# Altium PCB PCB1.PcbDoc
Units mm, origin at the board's own origin, x right, y up, seen from the top; angles counter-clockwise.
Board outline 65.1 x 66.4 mm, 2 copper layers (Top Layer, Bottom Layer); 68 components, 42 nets, 260 pads, 22 vias.
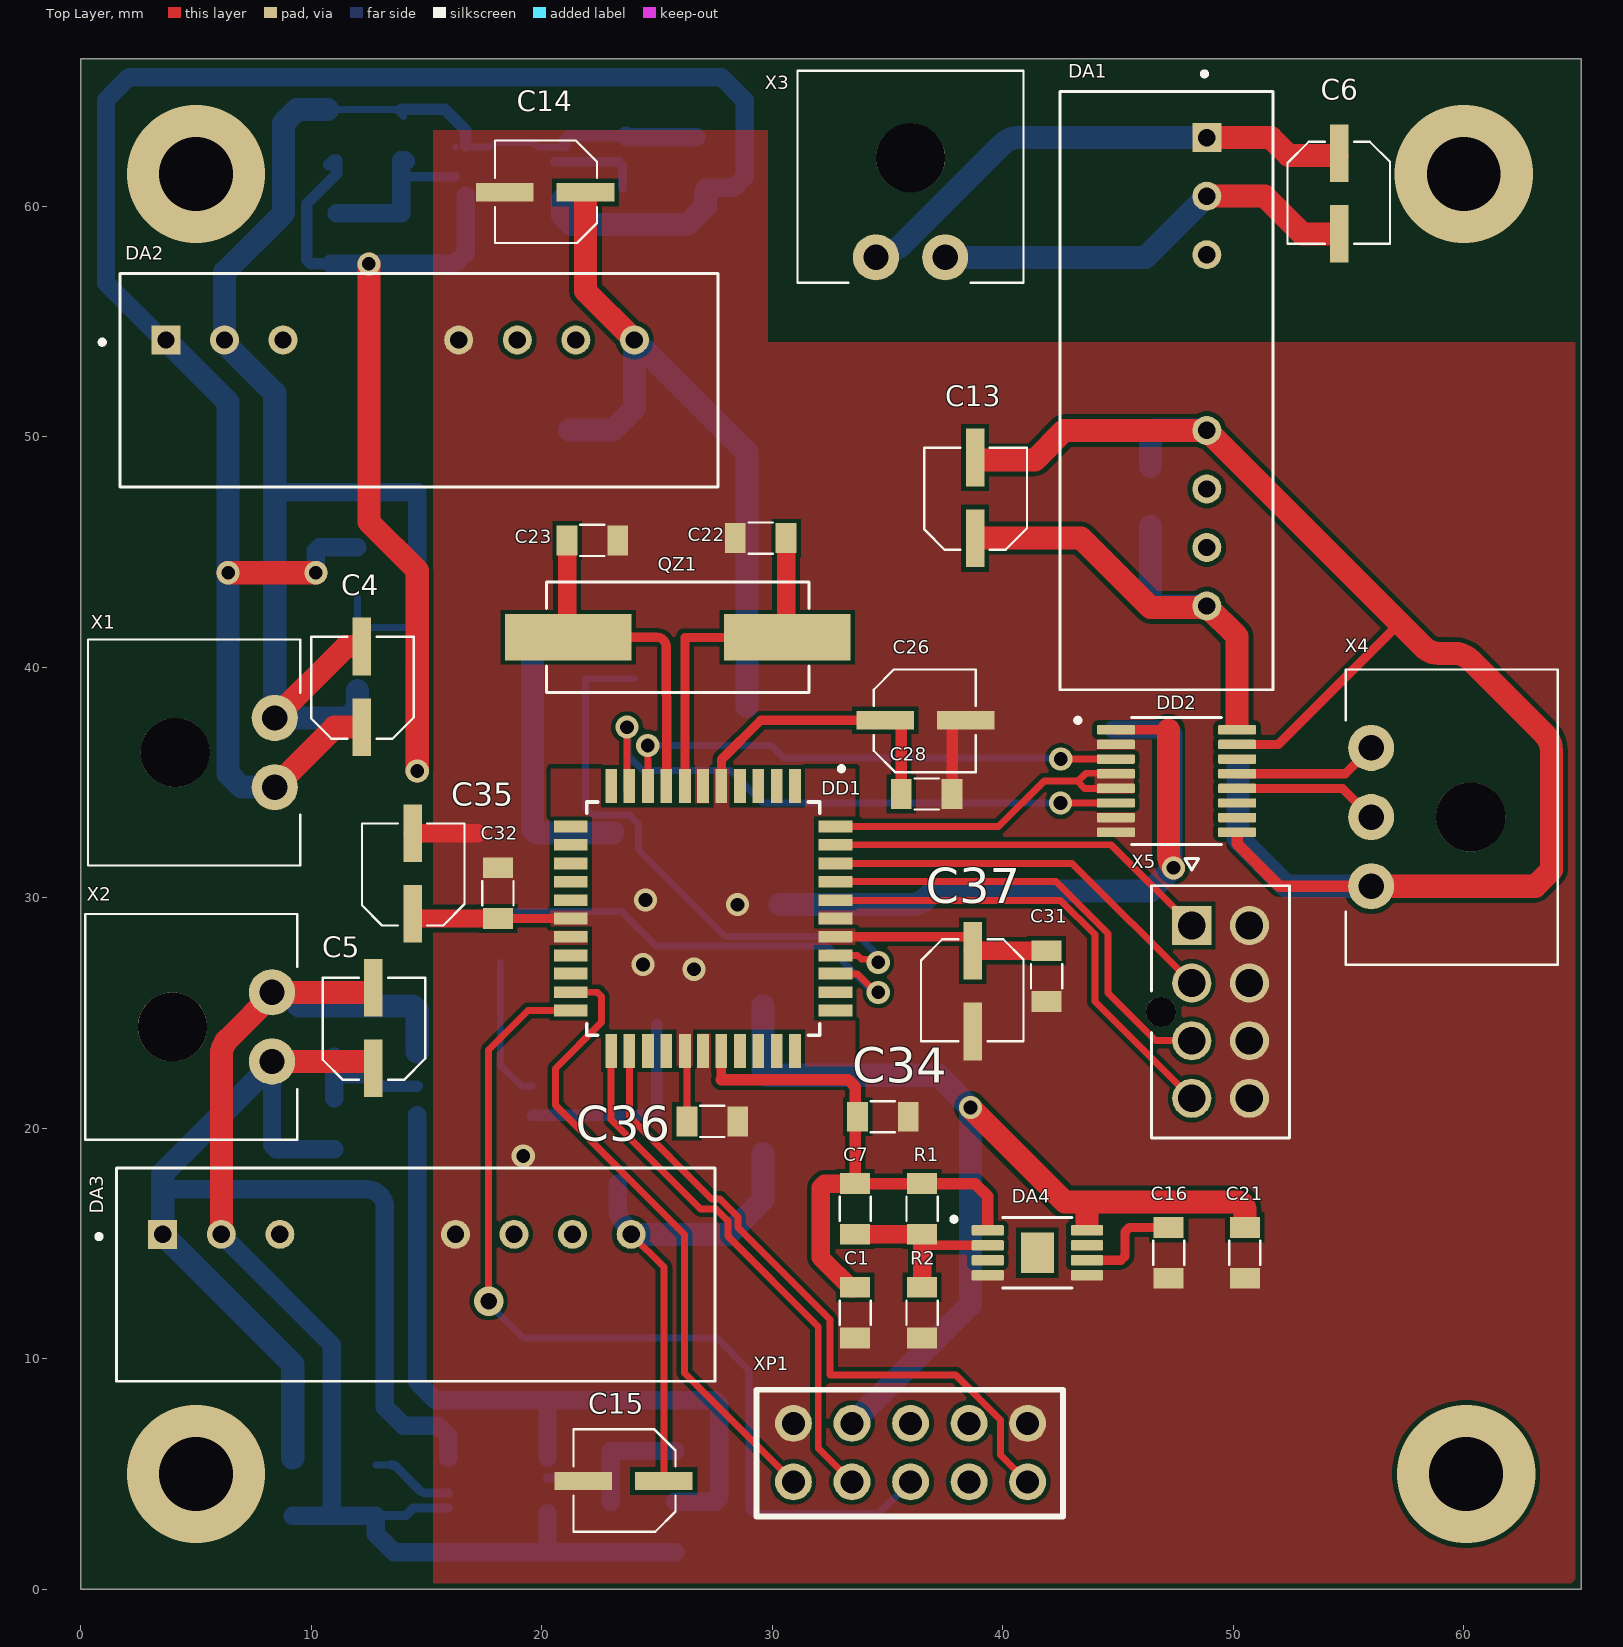
[diagram p0: Top Layer view]
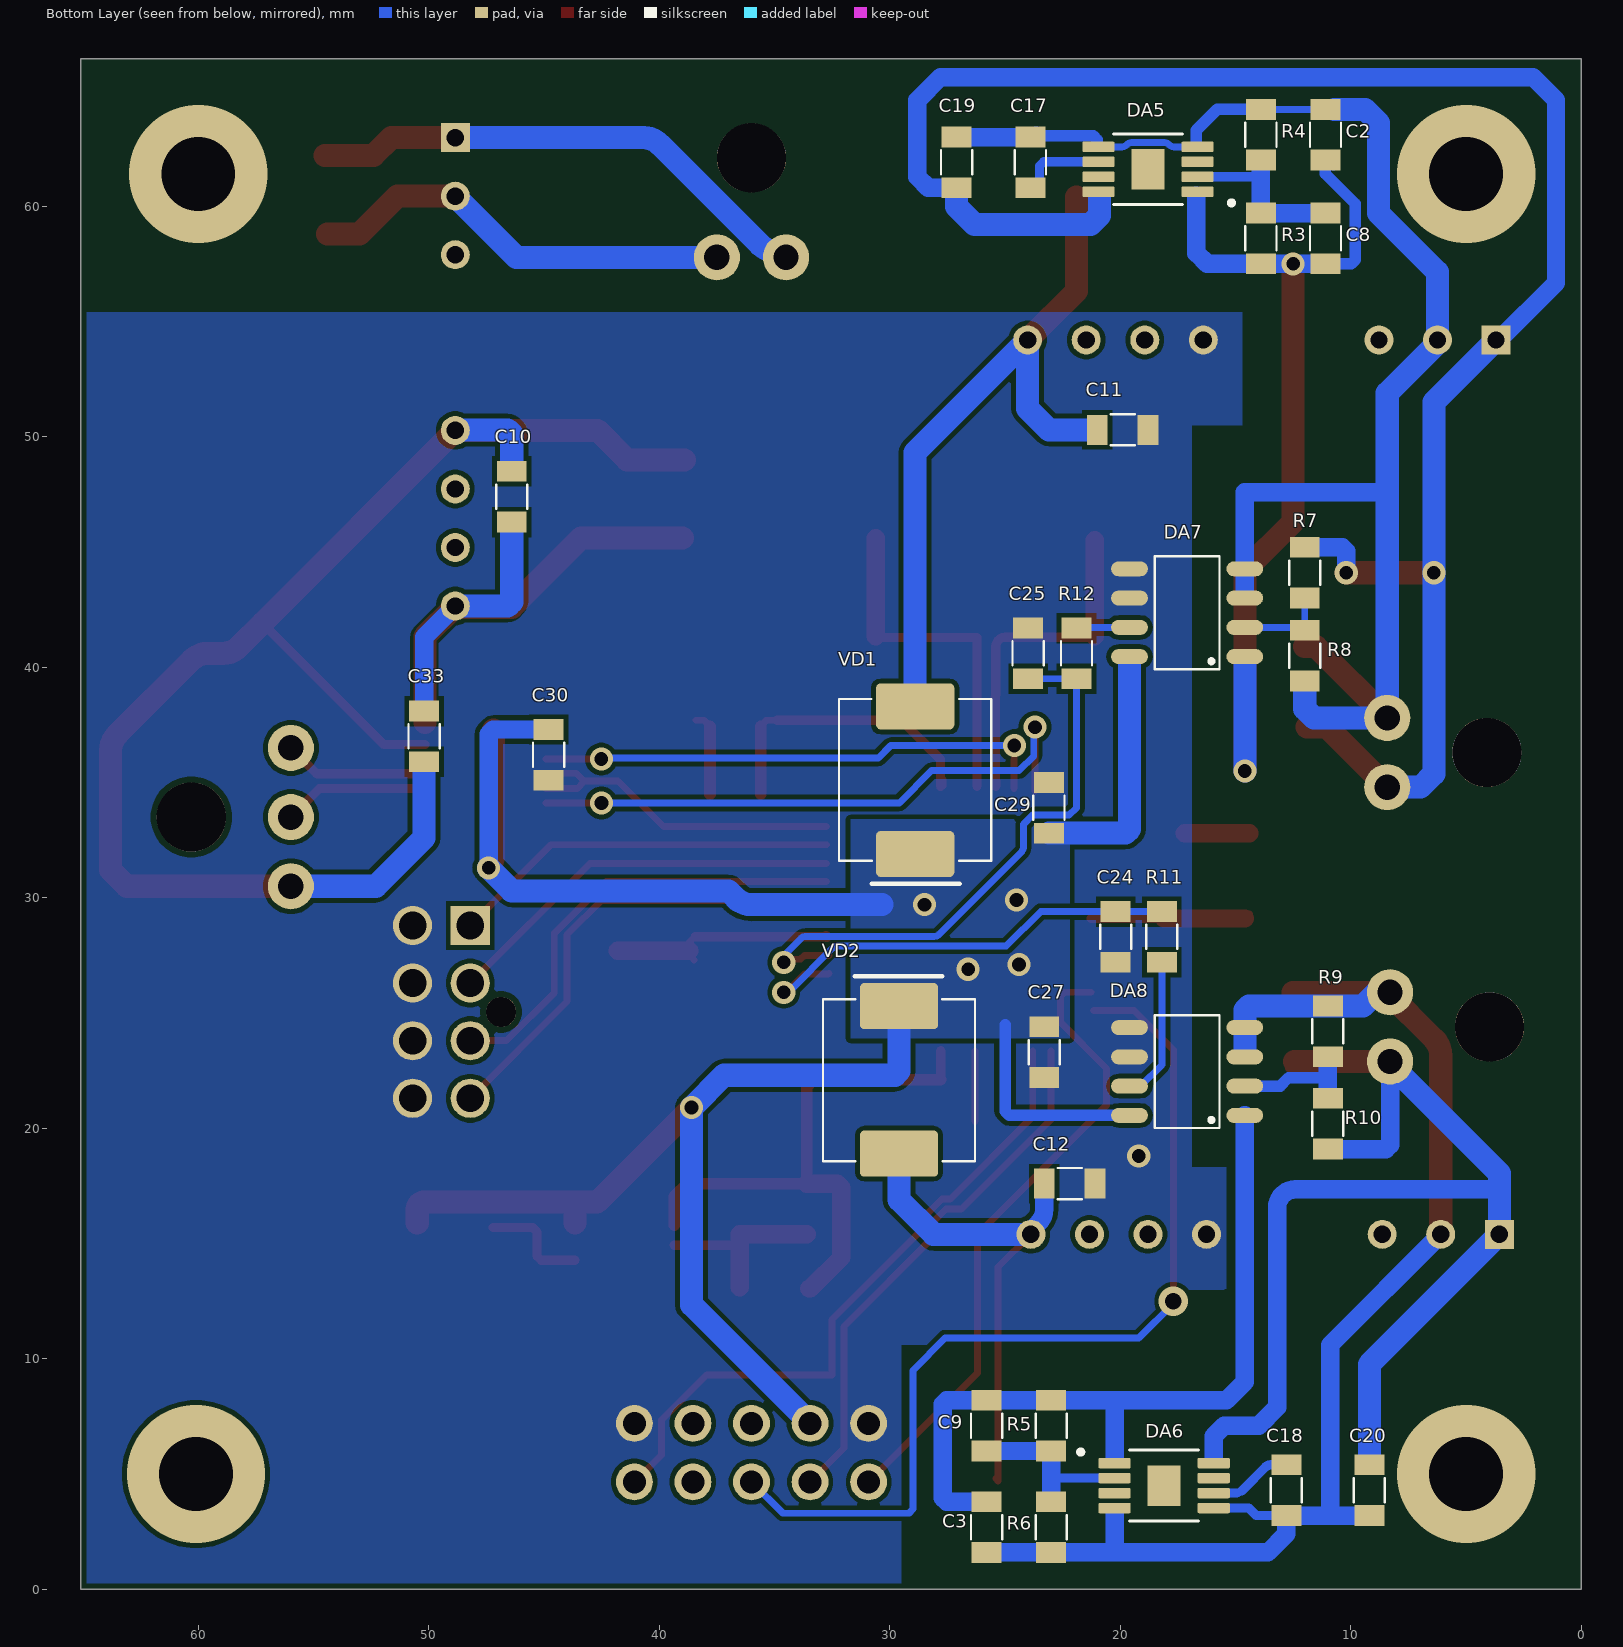
[diagram p1: Bottom Layer view, seen from below]
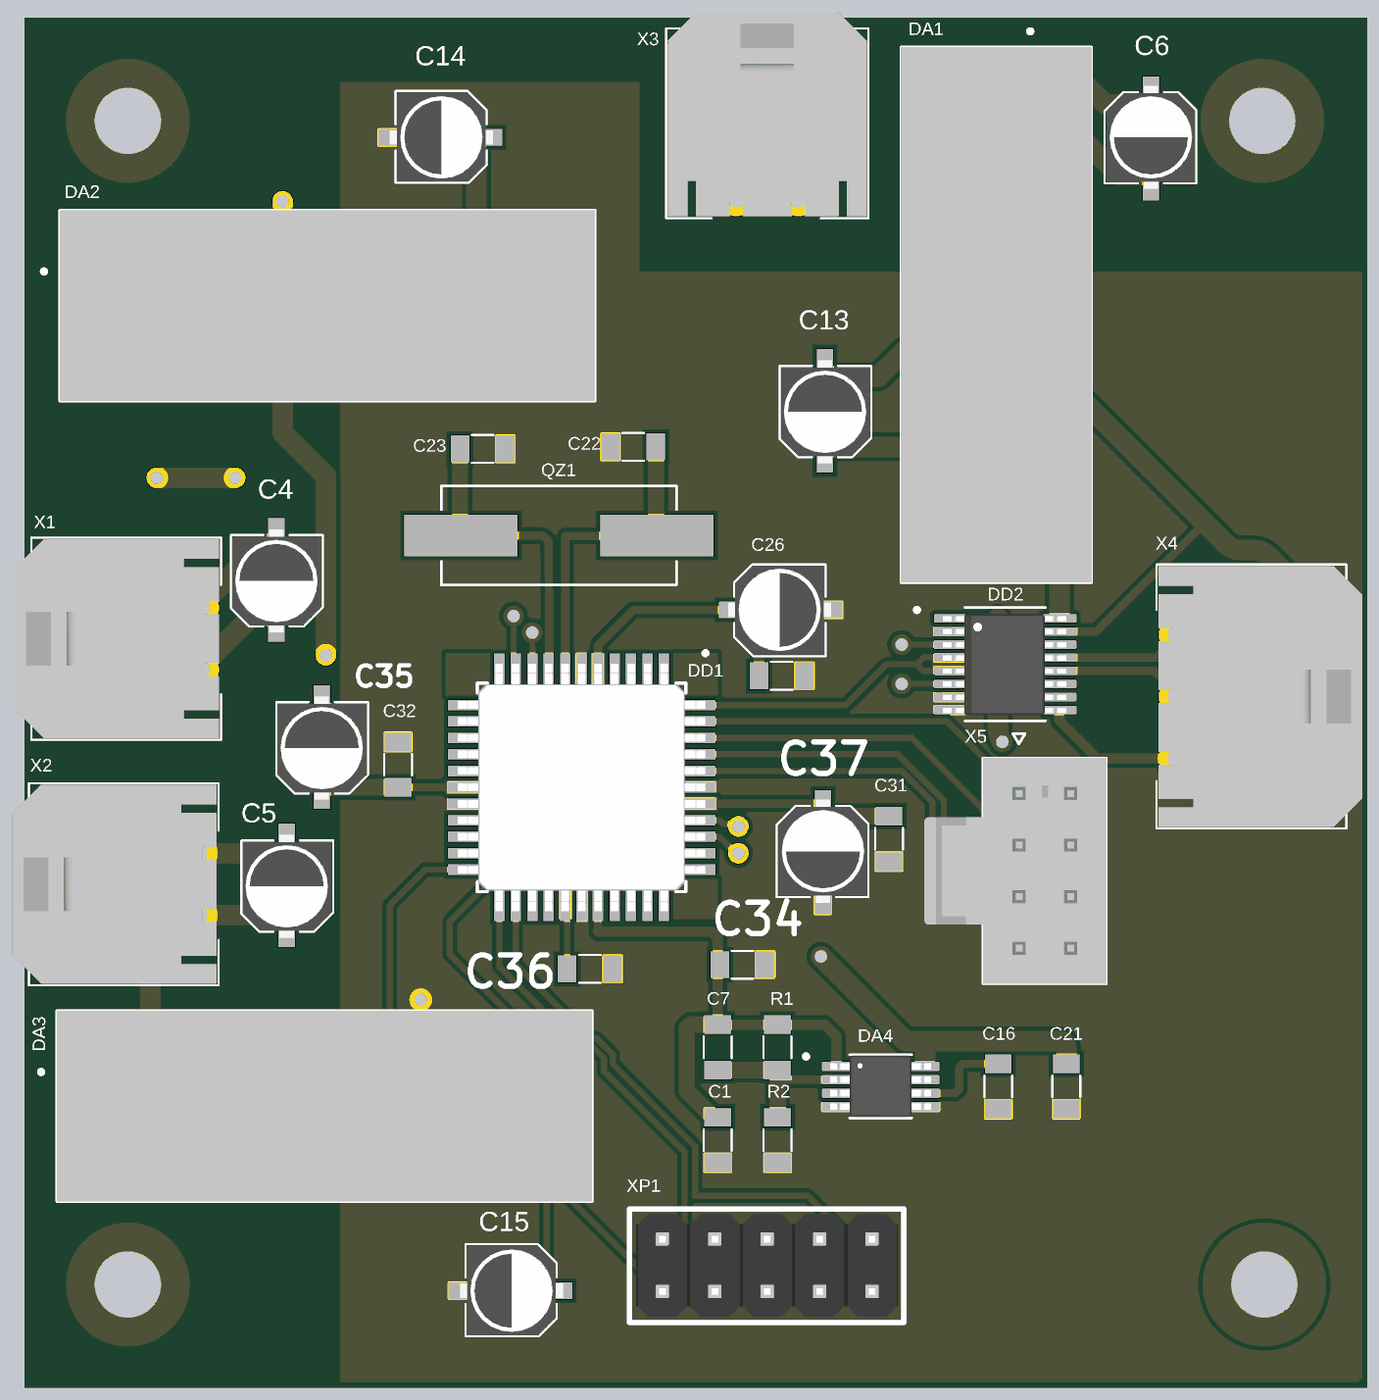
[diagram p2: 3D render of the assembled board from above, using the file's embedded part models]

## Layer stack, top to bottom
Top Solder: solder mask 0.0102, Solder Resist, Dk 3.5
Top Layer: signal copper 0.0356
Dielectric 1: dielectric 0.32, FR-4, Dk 4.8
Bottom Layer: signal copper 0.0356
Bottom Solder: solder mask 0.0102, Solder Resist, Dk 3.5

## Board outline
0,0 0,66.4 65.1,66.4 65.1,0

## Design rules (kind name [scope] priority, off if disabled: settings)
AcuteAngle [All] p1: minimum=3.50000000000000E+0001 checktracksonly=FALSE
BoardOutlineClearance "BoardOutlineClearance 1" [All] p1: gap=0.25 ignorepadtopadclearanceinfootprint=FALSE except(0: Arc-SplitContinuation Track-SplitContinuation SMDPad-SplitContinuation THPad-SplitContinuation Via-SplitContinuation Fill-SplitContinuation Poly-SplitContinuation Region-SplitContinuation Text-SplitContinuation) // Milling
Clearance "Clearance-1 1/2 Oz" [All] p1: gap=0.125 ignorepadtopadclearanceinfootprint=FALSE except(0.2: Arc-Fill Arc-Poly Track-Fill Track-Poly SMDPad-SMDPad SMDPad-Fill SMDPad-Poly THPad-Fill THPad-Poly Via-Fill Via-Poly Fill-Fill Fill-Poly Poly-Poly Poly-Region Poly-Text; 0.25: Arc-Hole Track-Hole SMDPad-Hole THPad-Hole Via-Hole Fill-Hole Poly-Hole Region-Hole Text-Hole) // Standart
ComponentClearance [All] p1: gap=0.1 collisioncheckmode=3 verticalgap=0.1 showdistances=FALSE
DiffPairsRouting DiffPair_DiffPairsRouting [InDifferentialPair ('XTAL')] p1: maxlimit=0.4 minlimit=0.2 mostfreqgap=0.3 toplayer_minwidth=0.3 toplayer_maxwidth=0.5 toplayer_prefwidth=0.4 bottomlayer_minwidth=0.3 bottomlayer_maxwidth=0.5 bottomlayer_prefwidth=0.4 maxuncoupledlength=12.7
DiffPairsRouting "Schematic Differential Pairs Routing_1" [InNet('RS_485_N')] p2: maxlimit=0.254 minlimit=0.254 mostfreqgap=0.254 toplayer_minwidth=0.381 toplayer_maxwidth=0.381 toplayer_prefwidth=0.381 bottomlayer_minwidth=0.381 bottomlayer_maxwidth=0.381 bottomlayer_prefwidth=0.381 maxuncoupledlength=12.7
DiffPairsRouting "Schematic Differential Pairs Routing" [InNet('RS_485_P')] p3: maxlimit=0.254 minlimit=0.254 mostfreqgap=0.254 toplayer_minwidth=0.381 toplayer_maxwidth=0.381 toplayer_prefwidth=0.381 bottomlayer_minwidth=0.381 bottomlayer_maxwidth=0.381 bottomlayer_prefwidth=0.381 maxuncoupledlength=12.7
DiffPairsRouting "DiffPairsRouting 1/2 Oz" [All] p4: maxlimit=0.254 minlimit=0.125 mostfreqgap=0.254 toplayer_minwidth=0.125 toplayer_maxwidth=0.5 toplayer_prefwidth=0.381 bottomlayer_minwidth=0.125 bottomlayer_maxwidth=0.5 bottomlayer_prefwidth=0.381 maxuncoupledlength=12.7
HoleSize "Minimum HoleSize" [IsPad] p1: absolutevalues=TRUE maxlimit=5.9 minlimit=0.6 maxpercent=80.000 minpercent=20.000
HoleSize "Minimum HoleSize VIA 1" [IsVia] p2: absolutevalues=TRUE maxlimit=5.9 minlimit=0.3 maxpercent=80.000 minpercent=20.000 // Standart
HoleToHoleClearance Hole2HoleClearance [All] p1: gap=0.25 allowstackedmicrovias=FALSE
MatchedLengths DiffPair_MatchedLengths [InDifferentialPair ('XTAL')] p1: tolerance=25.4 checknetsindiffpair=FALSE checkdiffpairvsdiffpair=TRUE checkxsignals=TRUE checkothers=TRUE
MatchedLengths [InDifferentialPair('RS_485')] p2: tolerance=1 checknetsindiffpair=TRUE checkdiffpairvsdiffpair=FALSE checkxsignals=FALSE checkothers=FALSE
MinimumAnnularRing "Minimum AR VIA Standart" [All] p1: minimumring=0.15
MinimumAnnularRing "Minimum AR PAD Standart" [All] p2: minimumring=0.2
MinimumSolderMaskSliver "SolderMask Bridge Standart" [All] p1: minsoldermaskwidth=0.1 // All Masks
PlaneClearance "PlaneClearance-1 1/2 Oz" [All] p1: clearance=0.2 // Standart
PlaneConnect "TermalConnect-1 1/2 Oz" [All] p1: planeconnectstyle=Relief reliefexpansion=0.2 reliefentries=4 reliefconductorwidth=0.2 reliefairgap=0.2 // Standart
PolygonConnect "PolygonConnect-1 1/2 Oz" [All] p1: connectstyle=Direct reliefconductorwidth=0.254 reliefentries=4 polygonreliefangle="90 Angle" airgapwidth=0.2 // Standart
RoutingCorners [All] p1 off: cornerstyle=45-Degree minsetback=2.54 maxsetback=2.54
RoutingVias [All] p1: holewidth=0.4 width=0.8 viastyle="Through Hole" minholewidth=0.3 minwidth=0.6 maxholewidth=5.9 maxwidth=8.9
SilkToSilkClearance Silk2SilkClearance [All] p1 off: silktosilkclearance=0.15
SilkToSolderMaskClearance Silk2SolderMaskClearance [IsPad] p1 off: minsilkscreentomaskgap=0.15 clearancetoexposedcopper=TRUE
SolderMaskExpansion SolderMaskExpansion-1 [All] p1: expansion=0.05 istentingtop=FALSE // Standart
UnRoutedNet [All] p1: checkbadconnections=TRUE
Width "Width 1/2 Oz" [All] p1: maxlimit=1 minlimit=0.2 preferedwidth=0.3 checkconnectedcopper=TRUE
19 further rules are at their usual default settings.

## Classes and differential pairs
differential pair RS_485: +RS_485_P -RS_485_N

## Components (designator, comment, footprint, x,y, rotation, side; value= is the part's Value field where it differs from the comment)
C1 "CAP" 0805 33.6,12 r270 top
C2 "CAP" 0805 11.1,63.1 r90 bottom
C3 "CAP" 0805 25.8,2.7 r270 bottom
C4 "CAP" "Cap pol 4x5.4" 12.2,40.9 r0 top
C5 "CAP" "Cap pol 4x5.4" 12.7,26.1 r0 top
C6 "CAP" "Cap pol 4x5.4" 54.6,58.8 r180 top
C7 "CAP" 0805 33.6,16.5 r270 top
C8 "CAP" 0805 11.1,58.6 r90 bottom
C9 "CAP" 0805 25.8,7.1 r270 bottom
C10 "CAP" 0805 46.4,47.4 r90 bottom
C11 "CAP" 0805 19.9,50.3 r180 bottom
C12 "CAP" 0805 22.2,17.6 r180 bottom
C13 "CAP" "Cap pol 4x5.4" 38.8,49.1 r0 top
C14 "CAP" "Cap pol 4x5.4" 18.4,60.6 r90 top
C15 "CAP" "Cap pol 4x5.4" 21.8,4.7 r90 top
C16 "CAP" 0805 47.2,14.6 r270 top
C17 "CAP" 0805 23.9,61.9 r90 bottom
C18 "CAP" 0805 12.8,4.3 r270 bottom
C19 "CAP" 0805 27.1,61.9 r90 bottom
C20 "CAP" 0805 9.2,4.3 r270 bottom
C21 "CAP" 0805 50.5,14.6 r270 top
C22 "CAP" 0805 29.5,45.6 r0 top
C23 "CAP" 0805 22.2,45.5 r180 top
C24 "CAP" 0805 20.2,28.3 r270 bottom
C25 "CAP" 0805 24,40.6 r90 bottom
C26 "CAP" "Cap pol 4x5.4" 38.4,37.7 r270 top
C27 "CAP" 0805 23.3,23.3 r270 bottom
C28 "CAP" 0805 36.7,34.5 r0 top
C29 "CAP" 0805 23.1,33.9 r90 bottom
C30 "CAP" 0805 44.8,36.2 r270 bottom
C31 "CAP" 0805 41.9,26.6 r270 top
C32 "CAP" 0805 18.1,30.2 r90 top
C33 "CAP" 0805 50.2,37 r270 bottom
C34 "CAP" 0805 34.8,20.5 r180 top
C35 "CAP" "Cap pol 4x5.4" 14.4,32.8 r0 top
C36 "CAP" 0805 27.4,20.3 r0 top
C37 "CAP" "Cap pol 4x5.4" 38.7,24.2 r180 top
DA1 "Isolated DC/DC (TMR 2-2411WI)" SIP-9 47.1,52 r270 top
DA2 "Isolated DC/DC (TMR 2-2411WI)" SIP-9 14.675,52.45 r0 top
DA3 "Isolated DC/DC (TMR 2-2411WI)" SIP-9 14.535,13.65 r0 top
DA4 "TPS7A4901" HVSSOP-8 41.5,14.6 r0 top
DA5 "TPS7A4901" HVSSOP-8 18.8,61.6 r0 bottom
DA6 "TPS7A4901" HVSSOP-8 18.1,4.5 r180 bottom
DA7 "Isolated Op_Amp(AMC1350)" SOIC-8 14.6,40.46 r0 bottom
DA8 "Isolated Op_Amp(AMC1350)" SOIC-8 14.6,20.56 r0 bottom
DD1 "Atmega164PA" TQFP-44 27,29.1 r270 top
DD2 "Isolated RS485 Tranciever(ADM2461E)" SSOP-16 47.5,35 r0 top
QZ1 "Quartz rez" XTAL 25.9,41.3 r0 top
R1 "68K" 0805 36.5,16.5 r90 top
R2 "100K" 0805 36.5,12 r90 top
R3 "324K" 0805 13.9,58.6 r270 bottom
R4 "100K" 0805 13.9,63.1 r270 bottom
R5 "324K" 0805 23,7.1 r90 bottom
R6 "100K" 0805 23,2.7 r90 bottom
R7 "56К" 0805 12,44.1 r90 bottom
R8 "10K" 0805 12,40.5 r90 bottom
R9 "10К" 0805 11,24.2 r270 bottom
R10 "56К" 0805 11,20.2 r270 bottom
R11 "10К" 0805 18.2,28.3 r270 bottom
R12 "10К" 0805 21.9,40.6 r90 bottom
VD1 "Shottky Diode" SMC 28.9,35.1 r270 bottom
VD2 "Shottky Diode" SMC 29.6,22.1 r90 bottom
X1 "Molex 2 pin connector" "MolexMicroFit 2x1" 8.42,37.8 r270 top
X2 "Molex 2 pin connector" "MolexMicroFit 2x1" 8.3,25.9 r270 top
X3 "Molex 2 pin connector" "MolexMicroFit 2x1" 37.5,57.78 r180 top
X4 "3 pin RS485 connector (Molex)" "MolexMicroFit 3x1" 55.98,33.5 r90 top
X5 "Molex (Nanofit) 8 pin" "Molex Nanofit 8 pin" 46.86,25.05 r270 top
XP1 "JTAG Connector(10pin)" "PLD 10" 30.92,4.66 r0 top

## Footprints (in the part's own frame and the unit in brackets; to place one, negate y for a bottom-side part, rotate by r counter-clockwise, add the part's x,y. Pads: shape width x height; smd on the part's side, far side on the other; paste and mask are expansions set on the pad)
0805 [mm]
  rect 0.9x1.3 smd: 1(-1.1,0) 2(1.1,0)
  silkscreen extent -0.53,-0.67 0.53,0.67, body extent -1.05,-0.67 1.05,0.68, height 0.6
"Cap pol 4x5.4" [mm]
  rect 0.8x2.5 smd: 1(0,0) 2(0,-3.5)
  silkscreen extent -2.2,-4 2.25,0.43, body extent -2.15,-4.3 2.15,0.7, height 5.4
HVSSOP-8 [mm]
  rrect25% 1.4x0.45 smd: 1(-2.15,0.975) 2(-2.15,0.325) 3(-2.15,-0.325) 4(-2.15,-0.975) 5(2.15,-0.975) 6(2.15,-0.325) 7(2.15,0.325) 8(2.15,0.975)
  rect 1.425x1.76 smd paste-2: 9(0,0)
  silkscreen extent -3.72,-1.54 1.5,1.55, body extent -2.45,-1.5 2.45,1.5, height 1.1
"Molex Nanofit 8 pin" [mm]
  rect 1.7x1.7 hole 1.2 mask+0.076: 1(-3.75,1.34)
  round 1.7 hole 1.2 mask+0.076: 2(-1.25,1.34) 3(1.25,1.34) 4(3.75,1.34) 5(-3.75,3.84) 6(-1.25,3.84) 7(1.25,3.84) 8(3.75,3.84)
  round 1.3 hole 1.3 unplated mask+0.076: ""(0,0)
  silkscreen extent -6.65,-0.4 5.47,5.58, body extent -5.47,-3.25 5.47,5.59, height 10.58
"MolexMicroFit 2x1" [mm]
  round 2 hole 1.1: 1(3,0) 2(0,0)
  round 3 hole 3: A(1.5,-4.32)
  silkscreen extent -3.4,-8.1 6.4,1.1, body extent -3.33,-8.9 6.33,1, height 5.64
"MolexMicroFit 3x1" [mm]
  round 2 hole 1.1: 1(3,0) 2(0,0) 3(-3,0)
  round 3 hole 3: A(0,-4.32)
  silkscreen extent -6.4,-8.1 6.4,1.1, body extent -6.32,-8.87 6.32,1.03, height 5.64
"PLD 10" [mm]
  round 1.6 hole 1: 1(0,0) 2(0,2.54) 3(2.54,0) 4(2.54,2.54) 5(5.08,0) 6(5.08,2.54) 7(7.62,0) 8(7.62,2.54) 9(10.16,0) 10(10.16,2.54)
  silkscreen extent -1.6,-1.5 11.7,4, body extent -1.27,-1.23 11.43,3.77, height 8.6
SIP-9 [mm]
  rect 1.258x1.258 hole 0.75: 1(-10.975,1.75)
  round 1.258 hole 0.75: 2(-8.435,1.75) 3(-5.895,1.75) 6(1.725,1.75) 7(4.265,1.75) 8(6.805,1.75) 9(9.345,1.75)
  silkscreen extent -13.84,-4.62 12.98,4.62, body extent -12.97,-4.62 12.97,4.62, height 12.5
SMC [mm]
  rrect20% 2x3.4 smd: 1(-3.2,0) 2(3.2,0)
  silkscreen extent -3.52,-3.3 4.5,3.3, body extent -4.06,-3.15 4.06,3.15, height 2.77
SOIC-8 [mm]
  oval 1.6x0.65 smd: 1(0,0) 2(0,-1.27) 3(0,-2.54) 4(0,-3.81) 5(5,-3.81) 6(5,-2.54) 7(5,-1.27) 8(5,0)
  silkscreen extent 1.1,-4.35 3.9,0.55, body extent -0.36,-4.35 5.41,0.55, height 1.45
SSOP-16 [mm]
  rrect25% 1.65x0.41 smd: 1(-2.593,2.286) 2(-2.593,1.651) 3(-2.593,1.016) 4(-2.593,0.381) 5(-2.593,-0.254) 6(-2.593,-0.889) 7(-2.593,-1.524) 8(-2.593,-2.159) 9(2.667,-2.159) 10(2.667,-1.524) 11(2.667,-0.889) 12(2.667,-0.254) 13(2.667,0.381) 14(2.667,1.016) 15(2.667,1.651) 16(2.667,2.286)
  silkscreen extent -4.34,-2.68 1.98,2.81, body extent -3,-2.4 3,2.5, height 1.75
TQFP-44 [mil]
  rect 58x20 smd: 1(-226,157) 2(-226,126) 3(-226,94) 4(-226,63) 5(-226,31) 6(-226,0) 7(-226,-31) 8(-226,-63) 9(-226,-94) 10(-226,-126) 11(-226,-157) 23(226,-157) 24(226,-126) 25(226,-94) 26(226,-63) 27(226,-31) 28(226,0) 29(226,31) 30(226,63) 31(226,94) 32(226,126) 33(226,157)
  rect 20x58 smd: 12(-157,-226) 13(-126,-226) 14(-94,-226) 15(-63,-226) 16(-31,-226) 17(0,-226) 18(31,-226) 19(63,-226) 20(94,-226) 21(126,-226) 22(157,-226) 34(157,226) 35(126,226) 36(94,226) 37(63,226) 38(31,226) 39(0,226) 40(-31,226) 41(-63,226) 42(-94,226) 43(-126,226) 44(-157,226)
  silkscreen extent -260,-199 199,240, body extent -236,-236 236,236, height 46
XTAL [mm]
  rect 5.5x2 smd: 1(-4.75,0) 2(4.75,0)
  silkscreen extent -5.7,-2.4 5.7,2.4

## Part data
C4 C5 C6 C13 C14 C15 C26 C35 C37: library part "Cap Pol 10uF 16V", "ECAP SMD,  16VV, 105°C"
DA4 DA5 DA6: library part LDO(TPS7A4901DGNR)
QZ1: library part QZ, ComponentLink1Description=Chip&Dip, ComponentLink1URL=https://www.chipdip.ru/product0/8006373177
R1 R2 R3 R4 R5 R6 R7 R8 R9 R10 R11 R12: library part Res
DD1: ComponentLink1Description=Datasheet, ComponentLink1URL=https://static.chipdip.ru/lib/562/DOC011562915.pdf, ComponentLink2Description=Chip&Dip, ComponentLink2URL=https://www.chipdip.ru/product/atmega164pa-au?from=suggest_product
XP1: ComponentLink1Description=CHIPDIP, ComponentLink1URL=https://www.chipdip.ru/product/pld-10

## Via types
v1: diameter 1, hole 0.6, Top Layer to Bottom Layer, tented both sides, 10 vias
v2: diameter 1, hole 0.6, Top Layer to Bottom Layer, 7 vias
v3: diameter 6, hole 3.2, Top Layer to Bottom Layer, 4 vias
v4: diameter 1.27, hole 0.711, Top Layer to Bottom Layer, 1 vias

## Nets (pads, with @x,y where several pads share a name; then routed paths per layer and width w, separated by ;. In a path a pad name is that pad's centre, name@x,y a point inside that pad or via, vN(x,y) a via of type N, cw(c..) or ccw(c..) an arc to the next point about the centre after c; other vN are vias at no path point)
2B_AREF: C1.1 C7.1 C34.2 DA4.1 DD1.29 R1.2 | length 25.3
  Top Layer w0.3: C1.1@33.5,13 C1.1
  Top Layer w0.4: 27.787,22.113 DD1.29
  Top Layer w0.5: 27.787,22.113 27.8,22.1 33.307,22.1 33.6,21.807 33.6,20.5 C7.1 R1.2 38.8,17.6 39.35,17.05 39.35,15.8
  Top Layer w0.8: C1.1@33.5,13.05 33.45,13.05 32.1,14.4 32.1,17.424 32.276,17.6 C7.1
5В: C21.1 C26.2 C27.1 C28.1 C29.1 C30.1 C31.1 C32.1 C35.2 C36.1 C37.2 DA4.8 DA7.8 DA8.8 DD1.5 DD1.17 DD1.27 DD1.38 DD2.1 VD1.2 VD2.2 XP1.4 | length 131.4
  Top Layer w0.3: C35.2 C35.2@14.6,29.1 ; C36.1 26.3,23.347 DD1.27@26.313,23.36 ; DD1.5@27.687,34.84 DD1.5@27.687,35.123 ; C26.2 35.35,37.7 C26.2@35.6,37.45 ; C37.2@38.45,28.313 38.7,28.063 C37.2 ; C37.2@38.487,27.313 C37.2@38.5,27.3 ; 43.65,16.674 43.524,16.8 43.65,16.8 ; 47.186,37.286 47.4,37.5 ; 47.354,34.746 47.4,34.7
  Top Layer w0.4: C32.1 DD1.17 ; DD1.5@27.8,34.84 27.8,36 29.5,37.7 C26.2 ; DD1.38@32.84,28.313 C37.2@38.45,28.313 ; DD2.1 47.186,37.286 ; 47.186,34.746 47.354,34.746
  Top Layer w0.45: DD1.38 DD1.38@32.769,28.342
  Top Layer w0.5: C28.1 C26.2@35.6,37.45
  Top Layer w0.8: C35.2@14.6,29.1 C32.1 ; C37.2 C31.1@41.8,27.7
  Top Layer w1: v1(38.6,20.9) 42.7,16.8 43.524,16.8 ; 43.65,15.9 43.65,16.674 ; 43.65,16.8 50.2,16.8 cw(c50.2,16.5) 50.5,16.5 C21.1@50.5,15.9 ; 47.186,37.286 47.186,34.746 47.186,31.916 ccw(c48.186,31.918) v1(47.4,31.3)
  Bottom Layer w0.3: XP1.4@33.26,7.2 XP1.4
  Bottom Layer w0.5: DA8.8 24.824,20.56 25,20.736 25,24.5
  Bottom Layer w0.8: C30.1 47.2,37.3 47.4,37.1 v1(47.4,31.3)
  Bottom Layer w1: DA7.8@19.6,40.2 19.6,32.976 19.776,32.8 C29.1 ; VD2.2 29.6,22.476 29.776,22.3 37.2,22.3 v1(38.6,20.9) 38.6,12.34 XP1.4 ; 30.34,29.7 35.986,29.7 ccw(c35.986,30.7) 36.693,29.993 37,30.3 46.4,30.3 v1(47.4,31.3)
  other v1: 26.6,26.9 24.4,27.1 28.5,29.7 24.5,29.9
5В_RS485: C10.1 C13.2 C33.1 DA1.9 DD2.16 | length 27.6
  Top Layer w0.3: DA1.9@48.795,42.6 DA1.9
  Top Layer w1: C13.2@39,45.6 43.4,45.6 46.4,42.6 DA1.9@48.795,42.6 ; DA1.9 50.167,41.338 50.167,37.6
  Bottom Layer w0.8: DA1.9 50.2,41.305 C33.1
  Bottom Layer w1: C10.1@46.4,46.1 46.4,42.831 46.576,42.655 DA1.9
5В_Оп.ус.1: C2.1 C8.1 DA5.1 DA7.1 R3.2 | length 43
  Top Layer w1: v2(12.5,57.5) 12.5,46.3 14.6,44.2 v2(14.6,35.5)
  Bottom Layer w0.3: C8.1@10.7,57.5 C8.1 ; DA7.1@14.6,40.2 DA7.1
  Bottom Layer w0.5: C8.1@10.7,57.5 9.976,57.5 9.8,57.676 9.8,60.1 11.1,61.4 C2.1 10.97,62 C2.1@10.77,61.8
  Bottom Layer w0.8: C8.1@10.85,57.5 12.354,57.5 v2(12.5,57.5) 13.5,57.5 16.231,57.5 16.7,57.969 DA5.1@16.7,60.45
  Bottom Layer w1: v2(14.6,35.5) DA7.1@14.6,40.2
5В_Оп.ус.2: C3.1 C9.1 DA6.1 DA8.1 R5.2 | length 33.6
  Bottom Layer w0.8: DA8.1 14.6,8.998 15.398,8.2 R5.2 C9.1 27.524,8.2 27.7,8.024 27.7,3.976 27.524,3.8 C3.1 ; DA6.1@20.25,5.7 20.25,8.2
ADC_1: C25.1 DD1.37 R12.1 | length 26.1
  Top Layer w0.3: DD1.37@32.641,27.5 33.7,27.5 33.866,27.334 34.466,27.334 v2(34.6,27.2)
  Bottom Layer w0.3: C25.1 R12.1 21.9,33.9 22.218,33.582 23.807,33.582 24.2,33.189 24.2,32.2 ccw(c24.5,32.2) 24.287,31.989 27.864,28.412 ccw(c28.075,28.625) 28.074,28.325 33.64,28.325 cw(c33.64,28.025) 33.852,28.237 34.7,27.389 v2@34.7,27.2
ADC_2: C24.1 DD1.36 R11.1 | length 20.2
  Top Layer w0.3: DD1.36@32.64,26.712 32.653,26.7 33.7,26.7 34.5,25.9 v2(34.6,25.9)
  Bottom Layer w0.3: R11.1 C24.1 23.45,29.4 24.95,27.9 32.276,27.9 cw(c32.276,27.6) 32.487,27.813 34.313,25.987 ccw(c34.524,26.2) 34.523,25.9 v2@34.7,25.9
NetC7_2: C7.2 DA4.2 R1.1 R2.2 | length 8.1
  Top Layer w0.3: 36.5,14.9 36.525,14.925
  Top Layer w0.4: 36.525,14.925 DA4.2
  Top Layer w0.8: C7.2 R1.1 36.5,14.9 R2.2
NetC8_2: C8.2 DA5.2 R3.1 R4.2 | length 7.5
  Bottom Layer w0.4: 14.1,61.275 DA5.2@16.25,61.275
  Bottom Layer w0.8: C8.2 R3.1 R4.2 14.05,62 R4.2@14.1,61.95
NetC9_2: C9.2 DA6.2 R5.1 R6.2 | length 7.8
  Bottom Layer w0.3: 22.925,4.825 23,4.9
  Bottom Layer w0.4: DA6.2 22.925,4.825
  Bottom Layer w0.8: R6.2 23,4.9 R5.1 C9.2
NetC11_1: C11.1 C14.2 DA2.9 VD1.1 | length 31.2
  Top Layer w1: C14.2@21.9,60.4 21.9,56.32 DA2.9
  Bottom Layer w1: C11.1@21.2,50.3 23.1,50.3 24.02,51.22 DA2.9 28.9,49.32 28.9,48.6 VD1.1
NetC12_1: C12.1 C15.2 DA3.9 VD2.1 | length 22.2
  Top Layer w0.3: DA3.9 25.3,13.98 C15.2 C15.2@25.4,4.8
  Bottom Layer w0.3: DA3.9 DA3.9@23.88,15.566
  Bottom Layer w0.8: C12.1 23.3,16.477 ccw(c24.1,16.477) 23.533,15.913 23.534,15.912 DA3.9@23.88,15.566
  Bottom Layer w1: DA3.9 28.1,15.4 29.6,16.9 VD2.1
NetC16_1: C16.1 DA4.6 | length 4.8
  Top Layer w0.4: DA4.6 45.124,14.275 45.3,14.451 45.3,15.5 45.5,15.7 C16.1
NetC17_1: C17.1 DA5.6 | length 4
  Bottom Layer w0.4: DA5.6@20.55,61.925 23.324,61.925 23.5,61.749 C17.1@23.5,60.8
NetC18_1: C18.1 DA6.6 | length 3.6
  Bottom Layer w0.3: C18.1 13.476,5.4 ; 14.738,4.262 ccw(c14.949,4.475) 14.949,4.175
  Bottom Layer w0.4: 13.476,5.4 cw(c13.476,5.1) 13.687,5.313 14.65,4.35 14.738,4.262 ; 14.949,4.175 DA6.6
NetC22_2: C22.2 DD1.7 QZ1.2 | length 15.2
  Top Layer w0.3: QZ1.2@30.6,41.35 QZ1.2 QZ1.2@30.637,41.287
  Top Layer w0.4: DD1.7 26.213,41.287 QZ1.2@30.637,41.287
  Top Layer w0.8: QZ1.2@30.6,41.35 C22.2
NetC23_2: C23.2 DD1.8 QZ1.1 | length 14.8
  Top Layer w0.3: QZ1.1@21.1,41.35 QZ1.1
  Top Layer w0.4: QZ1.1 25,41.3 cw(c25,40.9) 25.4,40.902 25.425,36.606 cw(c24.6,36.6) 25.425,36.6 25.425,35.377 DD1.8
  Top Layer w0.8: QZ1.1@21.1,41.35 C23.2@21.1,45.5
NetDA7_2: DA7.2 R7.1 R8.2 | length 4.1
  Bottom Layer w0.3: R7.1 R8.2 12.13,41.73 DA7.2
NetDA7_7: DA7.7 R12.2 | length 2.3
  Bottom Layer w0.3: DA7.7 21.87,41.73 R12.2
NetDA8_2: DA8.2 R9.2 R10.1 | length 5.6
  Bottom Layer w0.5: 11,22.2 12.7,22.2 13.07,21.83 DA8.2
  Bottom Layer w0.8: R10.1 11,22.2 R9.2
NetDA8_7: DA8.7 R11.2 | length 6.2
  Bottom Layer w0.3: R11.2 18.2,22.755 19.125,21.83 DA8.7
RE/DE: DD1.44 DD2.4 DD2.5 | length 14.9
  Top Layer w0.3: DD1.44 39.824,33.088 41.8,35.063 43.237,35.063 ; DD2.5 43.554,34.746 43.237,35.063 ; DD2.4 44.888,35.4 43.6,35.4 43.263,35.063 43.237,35.063
RS_485_N: DD2.13 X4.1 | length 6.3
  Top Layer w0.4: DD2.13 54.861,35.381 X4.1
RS_485_P: DD2.12 X4.2 | length 6.3
  Top Layer w0.4: DD2.12 54.734,34.746 X4.2
RxD: DD1.9 DD2.3 | length 22.4
  Top Layer w0.3: v1(24.6,36.6) 24.612,35.503 cw(c24.312,35.5) DD1.9@24.612,35.5 ; DD1.9@24.612,34.74 DD1.9@24.612,35.5 ; v1@42.5,36 v1(42.516,36.016) DD2.3
  Bottom Layer w0.3: v1(24.6,36.6) 29.958,36.6 30.5,36.058 42.474,36.058 v1(42.516,36.016)
SSR1: DD1.40 X5.4 | length 20.8
  Top Layer w0.3: DD1.40 42.513,29.887 44,28.4 44,25.5 X5.4 X5.4@48.1,21.3
SSR2: DD1.41 X5.3 | length 19.8
  Top Layer w0.3: DD1.41 42.301,30.7 44.557,28.444 44.557,25.868 46.625,23.8 X5.3
SSR3: DD1.42 X5.2 | length 17.6
  Top Layer w0.3: DD1.42 43.012,31.488 X5.2
SSR4: DD1.43 X5.1 | length 16.9
  Top Layer w0.3: DD1.43 44.7,32.3 X5.1
TCK: DD1.21 XP1.1 | length 27.6
  Top Layer w0.3: DD1.21 22.424,25.9 22.6,25.724 22.6,24.6 20.6,22.6 20.6,21 26.2,15.4 26.2,9.38 XP1.1
TDI: DD1.24 XP1.9 | length 29.3
  Top Layer w0.3: DD1.24 23.8,20.5 27.371,16.929 27.73,16.929 28.509,16.15 28.509,15.691 32.5,11.7 32.5,9.3 37.96,9.3 39.908,7.352 39.908,5.832 XP1.9
TDO: DD1.23 XP1.3 | length 23.4
  Top Layer w0.3: DD1.23 23.012,20.388 26.896,16.504 27.554,16.504 28.084,15.974 28.084,15.316 31.995,11.405 31.995,6.125 XP1.3
TMS: DD1.22 XP1.5 | length 41.2
  Top Layer w0.3: v4(17.7,12.5) 17.7,23.4 19.412,25.112 DD1.22@21.16,25.112
  Bottom Layer w0.3: v4@17.7,12.4 19.2,10.9 27.6,10.9 29,9.5 29,3.476 29.176,3.3 34.64,3.3 XP1.5
TxD: DD1.10 DD2.6 | length 26.2
  Top Layer w0.3: DD1.10@23.7,34.641 v1(23.7,37.4) ; v1@42.5,34.1 v1(42.511,34.111) DD2.6
  Bottom Layer w0.3: v1@23.8,37.6 23.754,37.554 23.754,36.15 24.391,35.513 28.187,35.513 29.589,34.111 v1(42.511,34.111)
U1(+): C4.2 C19.1 DA2.1 DA5.8 R7.2 X1.1 | length 86.6
  Top Layer w1: v2(6.4,44.1) v2(10.2,44.1) ; X1.1 11.02,37.4 C4.2@11.9,37.4
  Bottom Layer w0.3: X1.1@8.414,34.806 X1.1
  Bottom Layer w0.8: DA2.1@3.625,54.15 1.1,56.675 1.1,64.602 2.098,65.6 27.8,65.6 28.8,64.6 28.8,61.269 28.331,60.8 C19.1 ; v2(10.2,44.1) 10.2,45.024 10.376,45.2 R7.2
  Bottom Layer w1: DA2.1 6.4,51.5 v2(6.4,44.1) 6.4,35.376 6.97,34.806 X1.1@8.414,34.806 ; 20.9,60.3 20.9,59.6 21.3,59.2 26.314,59.2 27.1,59.986 C19.1@27.1,60.6
U1(-): C2.2 C4.1 C17.2 C19.2 DA2.2 DA5.4 DA5.5 DA7.3 DA7.4 R4.1 R8.1 X1.2 | length 67.6
  Top Layer w1: X1.2 11.52,40.9 C4.1@12,40.9
  Bottom Layer w0.3: 8.42,40.6 8.52,40.5 ; C2.2@10.7,64.2 13.7,64.2 R4.1@14,63.9 ; DA5.4@16.7,62.625 DA5.4 17.671,62.575 ccw(c17.67,62.875) 17.887,62.668 cw(c18.088,62.48) 18.088,62.755 19.513,62.755 cw(c19.513,62.48) 19.713,62.668 ccw(c19.93,62.875) 19.929,62.575 DA5.5 DA5.5@21,62.625
  Bottom Layer w0.5: R4.1 15.8,64.2 16.7,63.3 DA5.4@16.7,62.625 ; DA5.5@21,62.625 21,62.874 21.176,63.05 C17.2@23.65,63.05
  Bottom Layer w0.8: 8.42,47.6 14.6,47.6 14.6,44.6 ; DA7.3@14.6,43.2 DA7.4 ; C17.2@23.65,63.05 23.7,63 C17.2 C19.2@26.7,63
  Bottom Layer w1: DA2.2@6.165,54.15 8.42,51.895 8.42,47.6 8.42,40.6 X1.2 11.6,37.8 12,38.2 R8.1@12,39 ; DA2.2 6.24,57.14 8.8,59.7 8.8,63.614 9.386,64.2 C2.2@10.7,64.2
U2(+): C5.2 C20.1 DA3.1 DA6.8 R10.2 X2.1 | length 55.6
  Top Layer w0.3: C5.2@12.45,22.9 12.7,22.65 C5.2
  Top Layer w1: X2.1@8.42,22.9 C5.2@12.45,22.9
  Bottom Layer w0.3: X2.1@8.3,22.78 X2.1 ; C20.1 C20.1@9.2,5.7
  Bottom Layer w0.8: 3.6,17.35 12.4,17.35 cw(c12.4,16.55) 13.2,16.552 13.2,7.898 13.998,7.1 15.5,7.1 15.95,6.65 DA6.8@15.95,5.7 ; X2.1@8.3,22.78 8.3,19.276 8.476,19.1 R10.2
  Bottom Layer w1: X2.1@8.42,22.9 8.3,22.78 3.56,18.04 DA3.1 9.2,9.76 C20.1@9.2,5.7
U2(-): C3.2 C5.1 C18.2 C20.2 DA3.2 DA6.4 DA6.5 DA8.3 DA8.4 R6.1 R9.1 X2.2 | length 60.9
  Top Layer w0.3: C5.1@12.5,25.9 C5.1
  Top Layer w1: DA3.2 6.1,23.166 cw(c7.1,23.166) 6.393,23.873 8.42,25.9 C5.1@12.5,25.9
  Bottom Layer w0.3: X2.2@8.42,25.9 X2.2@8.88,25.9
  Bottom Layer w0.4: C18.2 14.1,3.2 14.425,3.525 DA6.5
  Bottom Layer w0.8: DA3.2 10.9,10.6 10.9,3.2 ; C20.2 10.9,3.2 ; 20.25,3.3 20.25,1.776 20.426,1.6 ; C3.2 R6.1 20.426,1.6 ; 10.9,3.2 C18.2 12.8,2.4 13.6,1.6 20.426,1.6
  Bottom Layer w1: X2.2@8.88,25.9 9.48,25.3 R9.1 14.424,25.3 14.6,25.124 DA8.4@14.6,24.6 ; DA8.3@14.6,23.3 DA8.4
U3(+): C6.2 DA1.1 X3.1 | length 22.5
  Top Layer w0.3: C6.2@54.5,62.2 C6.2
  Top Layer w1: DA1.1 51.625,62.975 52.4,62.2 C6.2@54.5,62.2
  Bottom Layer w0.3: X3.1 X3.1@34.753,58.033
  Bottom Layer w1: X3.1@34.753,58.033 34.919,58.033 ccw(c34.919,59.033) 35.625,58.325 39.983,62.683 cw(c40.689,61.975) 40.687,62.975 40.689,62.975 DA1.1
U3(-): C6.1 DA1.2 X3.2 | length 18.7
  Top Layer w1: DA1.2 51.365,60.435 53,58.8 C6.1@54.4,58.8
  Bottom Layer w1: X3.2 46.195,57.78 DA1.2
Общ_5В: C1.2 C11.2 C12.2 C14.1 C15.1 C16.2 C21.2 C22.1 C23.1 C24.2 C25.2 C26.1 C27.2 C28.2 C29.2 C30.2 C31.2 C32.2 C34.1 C35.1 C36.2 C37.1 DA2.6 DA3.6 DA4.4 DA4.5 DA7.5 DA7.6 DA8.5 DA8.6 DD1.6 DD1.18 DD1.28 DD1.39 DD2.2 DD2.7 DD2.8 R2.1 X5.5 X5.6 X5.7 X5.8 XP1.2 XP1.10 | length 6.5
  Top Layer w0.3: C26.1@37.8,37.45 38.05,37.7 C26.1
  Top Layer w0.5: C28.2 C26.1@37.8,37.45
  Top Layer w0.8: C35.1 17.2,32.8
  other v2: 19.2,18.8
Общ_RS485: C10.2 C13.1 C33.2 DA1.6 DD2.9 DD2.15 X4.3 | length 74.5
  Top Layer w0.3: C13.1 C13.1@38.9,49
  Top Layer w0.4: DD2.15 51.951,36.651 57.212,41.912
  Top Layer w0.5: 50.167,32.6 50.167,32.333 52,30.5 X4.3
  Top Layer w1: C13.1@38.9,49 41.4,49 42.675,50.275 DA1.6 57.212,41.912 58.233,40.892 ccw(c58.939,41.6) 58.939,40.6 59.586,40.6 cw(c59.586,39.6) 60.292,40.308 63.508,37.092 cw(c62.8,36.386) 63.8,36.386 63.8,31.2 63.1,30.5 X4.3
  Bottom Layer w0.3: DA1.6@48.825,50.3 DA1.6
  Bottom Layer w1: C10.2@46.4,48.7 46.4,50.124 46.576,50.3 DA1.6@48.825,50.3 ; C33.2@50.2,35.7 50.2,32.6 52.3,30.5 X4.3
pads on no net: DA1.3 DA1.7 DA1.8 DA2.3 DA2.7 DA2.8 DA3.3 DA3.7 DA3.8 DA4.3 DA4.7 DA4.9 DA5.3 DA5.7 DA5.9 DA6.3 DA6.7 DA6.9 DD1.1 DD1.2 DD1.3 DD1.4 DD1.11 DD1.12 DD1.13 DD1.14 DD1.15 DD1.16 DD1.19 DD1.20 DD1.25 DD1.26 DD1.30 DD1.31 DD1.32 DD1.33 DD1.34 DD1.35 DD2.10 DD2.11 DD2.14 X1.A X2.A X3.A X4.A X5. XP1.6 XP1.7 XP1.8
copper on no net:
  other v3: 5,5 60.1,5 5,61.4 60,61.4

## Polygon pours and split planes (outlines as drawn)
Общ_5В on Bottom Layer "Общ_5В_L02_P005" (solid, remove dead copper, pour order 5): 16.9,55.4 16.9,10.6 29.5,10.6 29.5,0.2 65.1,0.2 65,52.7 65,55.4
Общ_5В on Bottom Layer "Общ_5В_L02_P009" (solid, pour order 9): 16.9,18.3 15.4,18.3 15.4,12.9 15.504,13.004 17.027,13.004 17.027,18.173
Общ_5В on Bottom Layer "Общ_5В_L02_P008" (solid, pour order 8): 16.9,55.4 14.7,55.4 14.7,50.5 17,50.5 17,55.3
5В on Bottom Layer "5В_L02_P001" (solid, remove dead copper, pour order 1): 22.3,33.4 22.2,33.3 22.2,23.9 31.7,23.9 31.7,33.4
Общ_5В on Top Layer "Общ_5В_L01_P003" (solid, remove dead copper, pour order 3): 15.3,63.3 15.3,0 64.4,0 65,0.6 65,48 65,54.1 29.8,54.1 29.8,54.4 29.8,54.8 29.8,63.3
5В on Top Layer "5В_L01_P002" (solid, pour order 2): 20.4,35.6 20.4,22.7 33.6,22.7 33.6,35.6
RE/DE on Top Layer "RE/DE_L01_P007" (solid, pour order 7): 45.874,35.698 45.872,35.7 44,35.7 44,34.4 44.002,34.398 45.863,34.398

## Silkscreen, mask and mechanical layers (free items; w line width, h text height)
Mechanical 13:
  the board outline again, w0.254